# Altium PCB USB-C_Horizontal_Bridge.PcbDoc
Units mm, origin at the board's own origin, x right, y up, seen from the top; angles counter-clockwise.
Board outline 50 x 50 mm, 4 copper layers (Top Layer, Layer 2, Layer 3, Bottom Layer), stack 1.526 mm thick; 11 components, 16 nets, 70 pads, 26 vias.
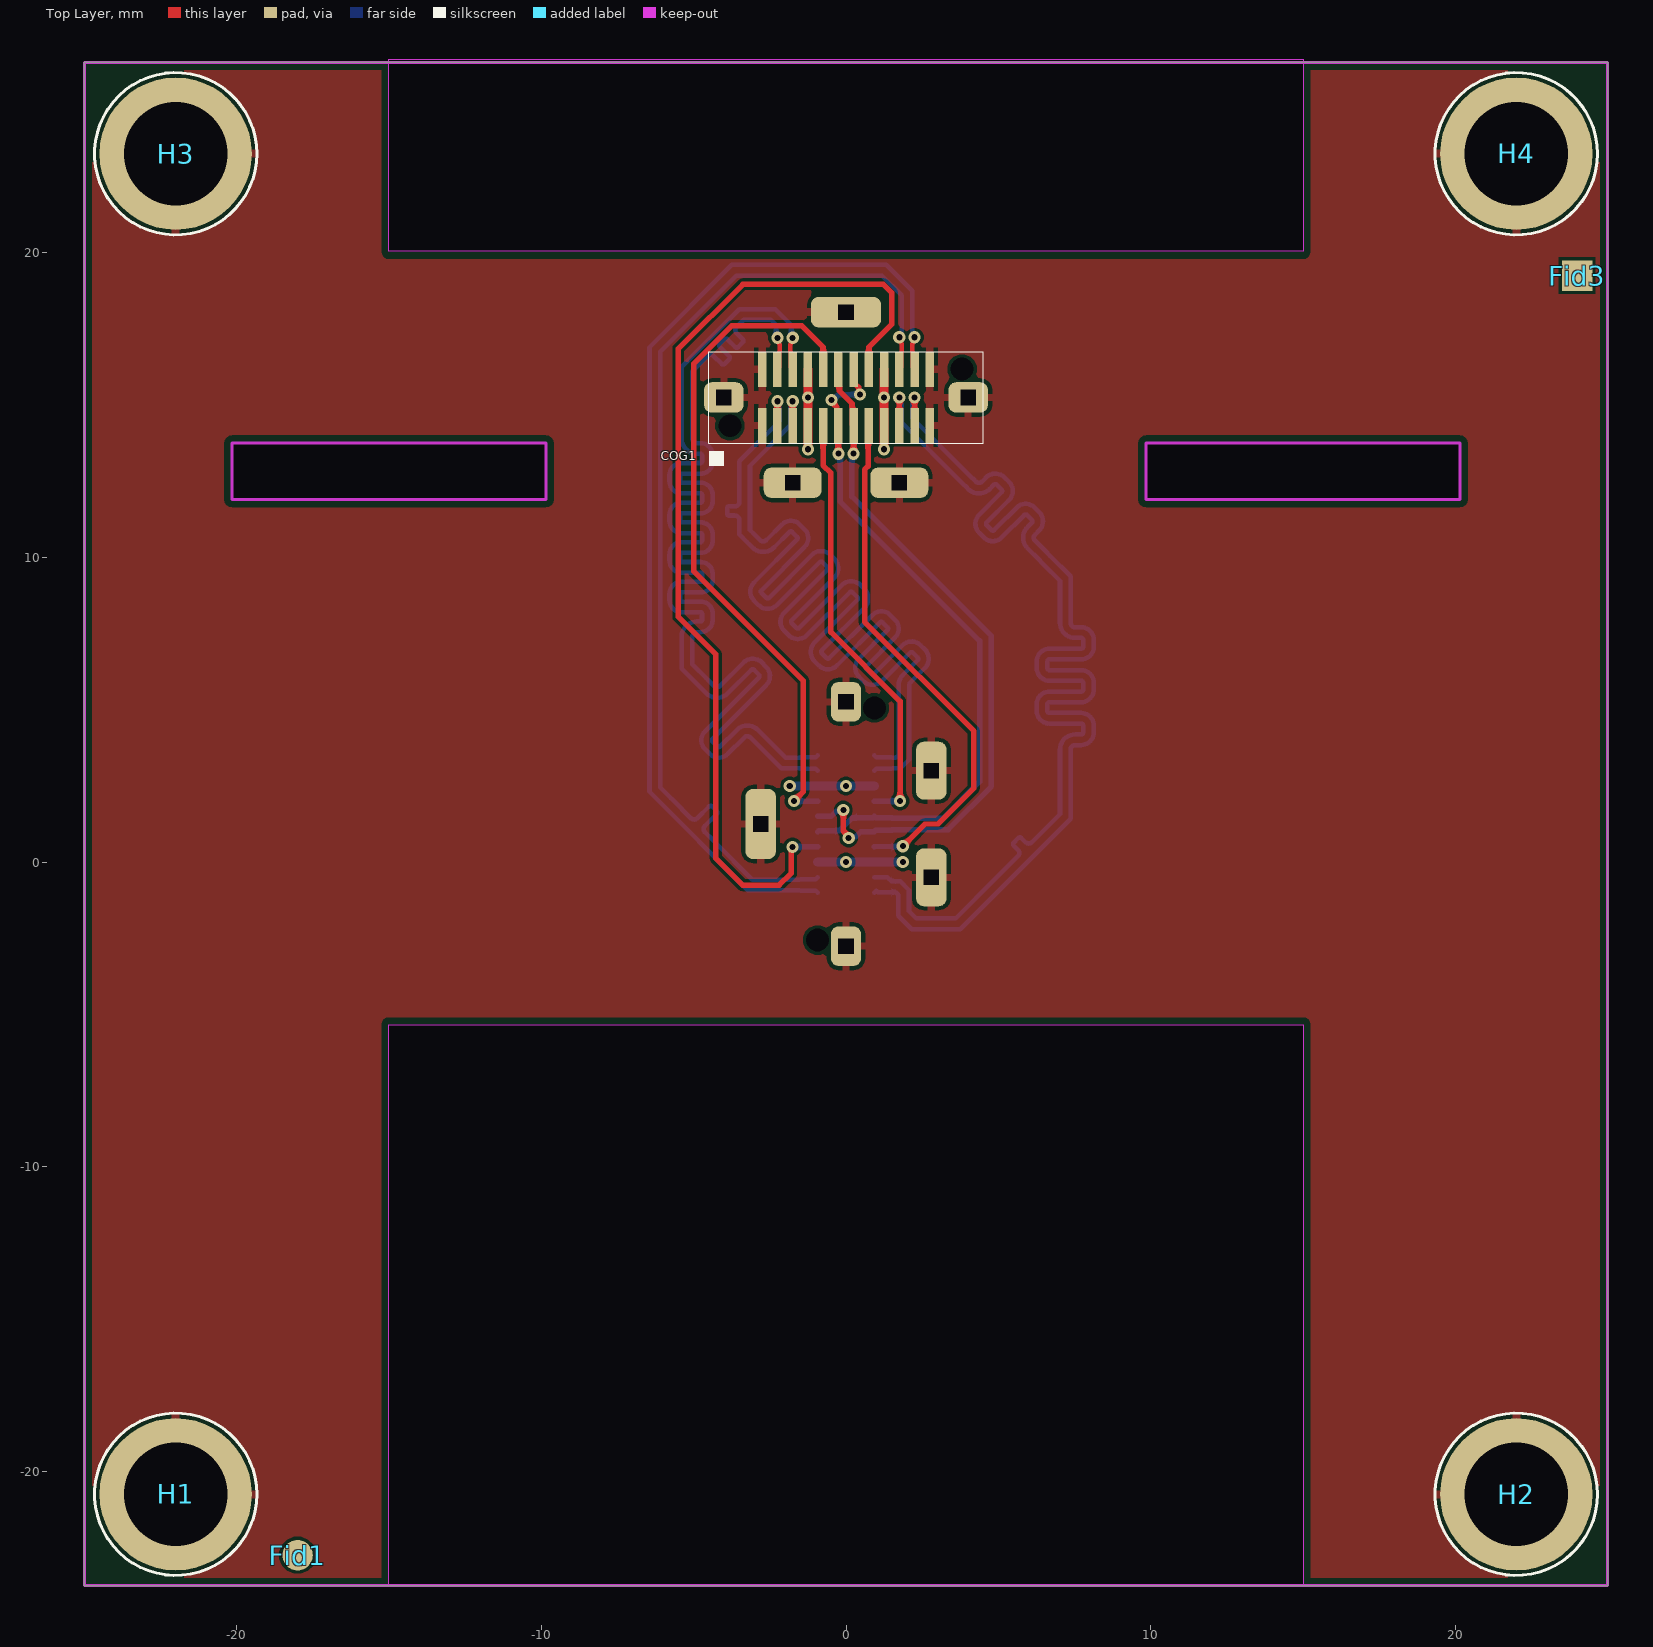
[diagram p0: Top Layer view]
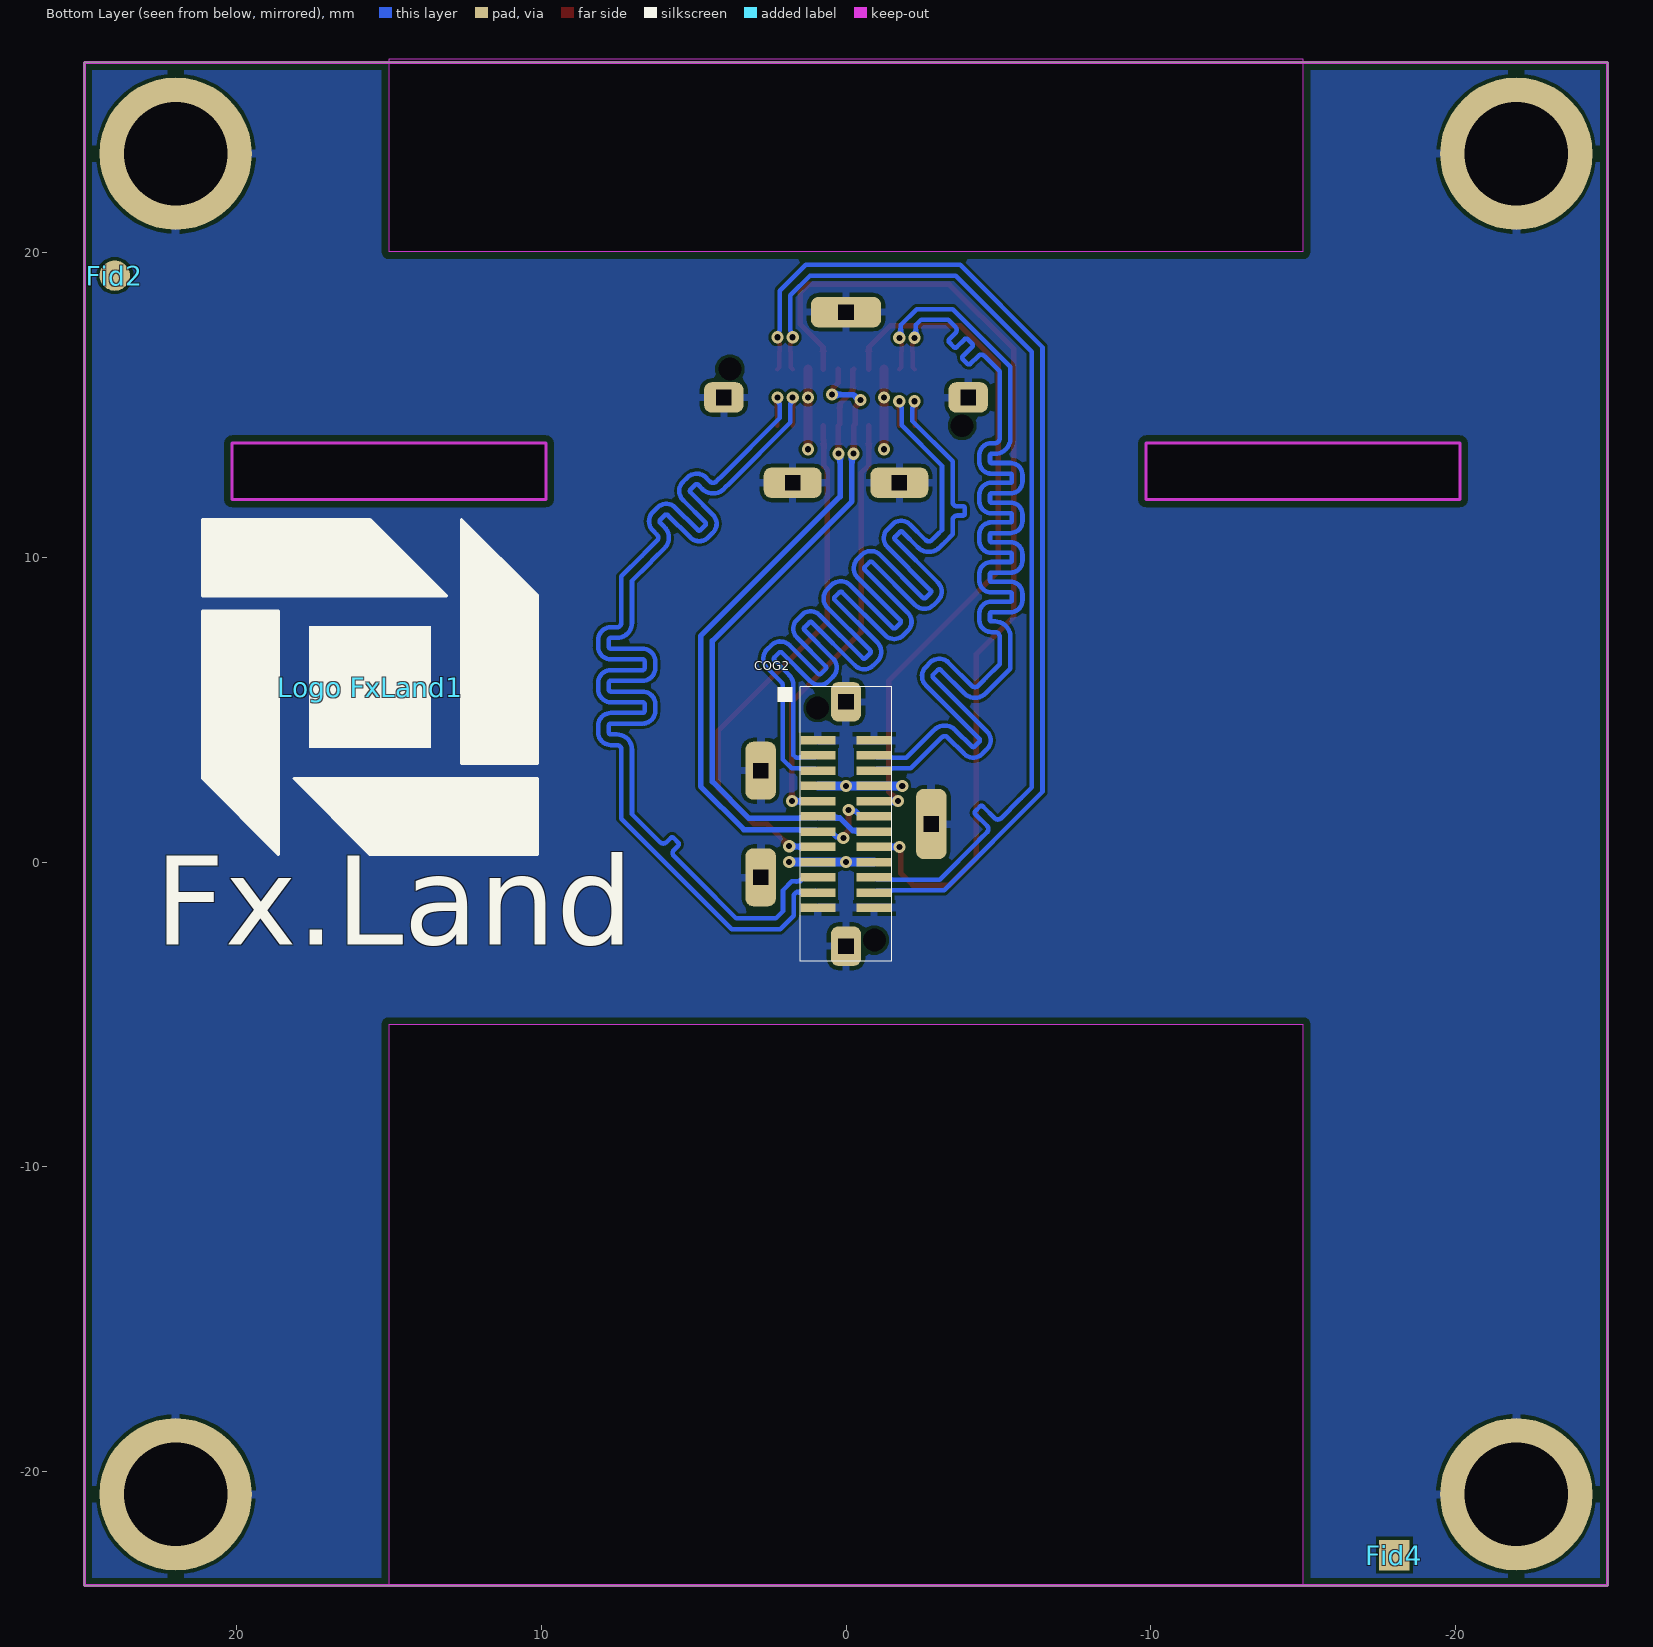
[diagram p1: Bottom Layer view, seen from below]
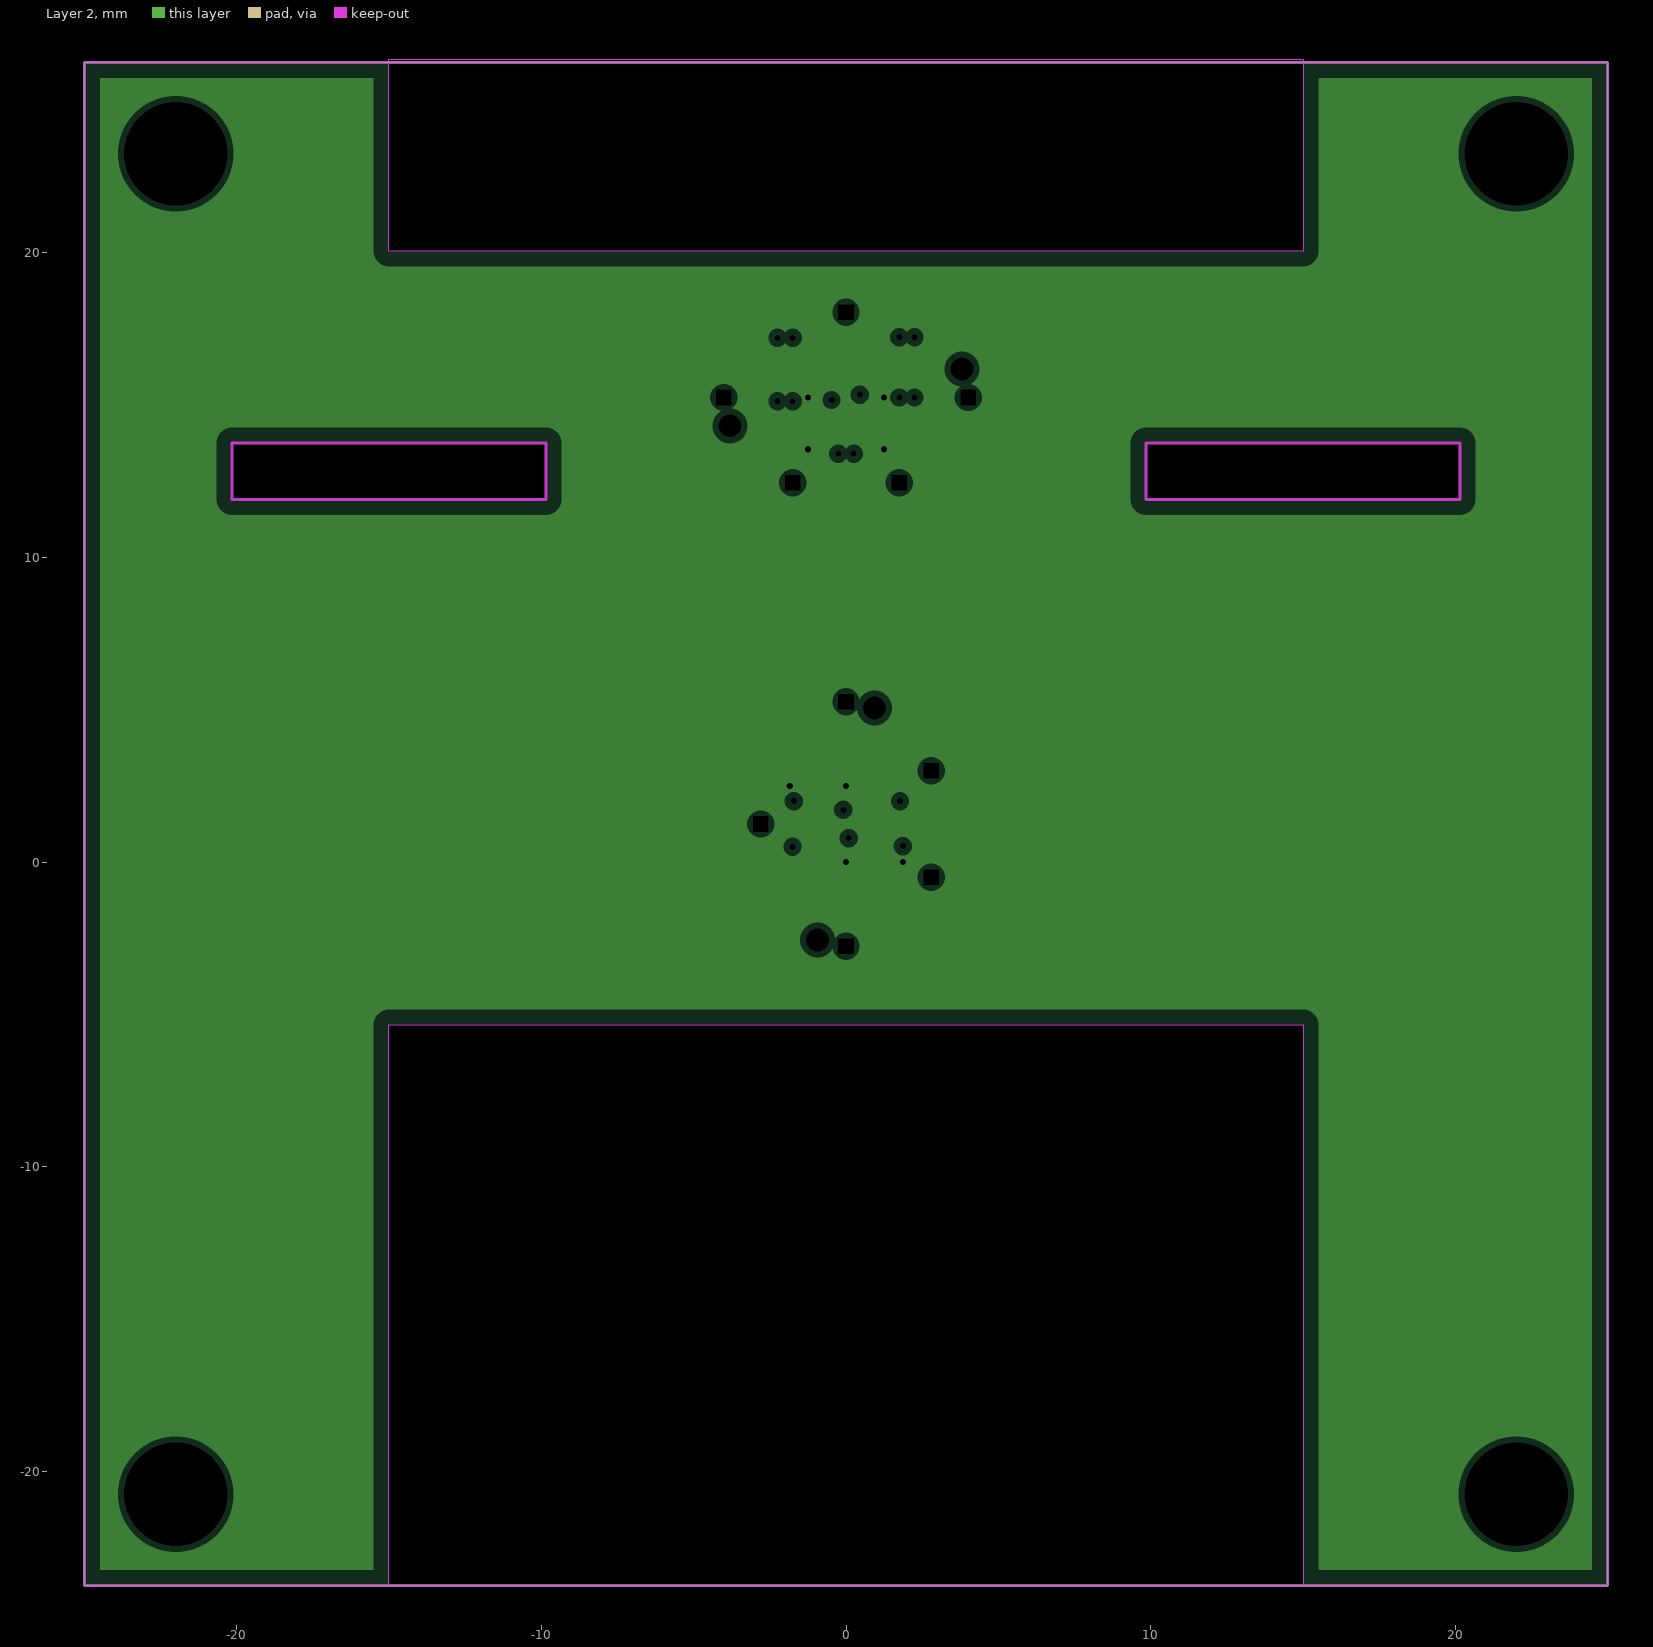
[diagram p2: Layer 2, clearances drawn from the general rule]
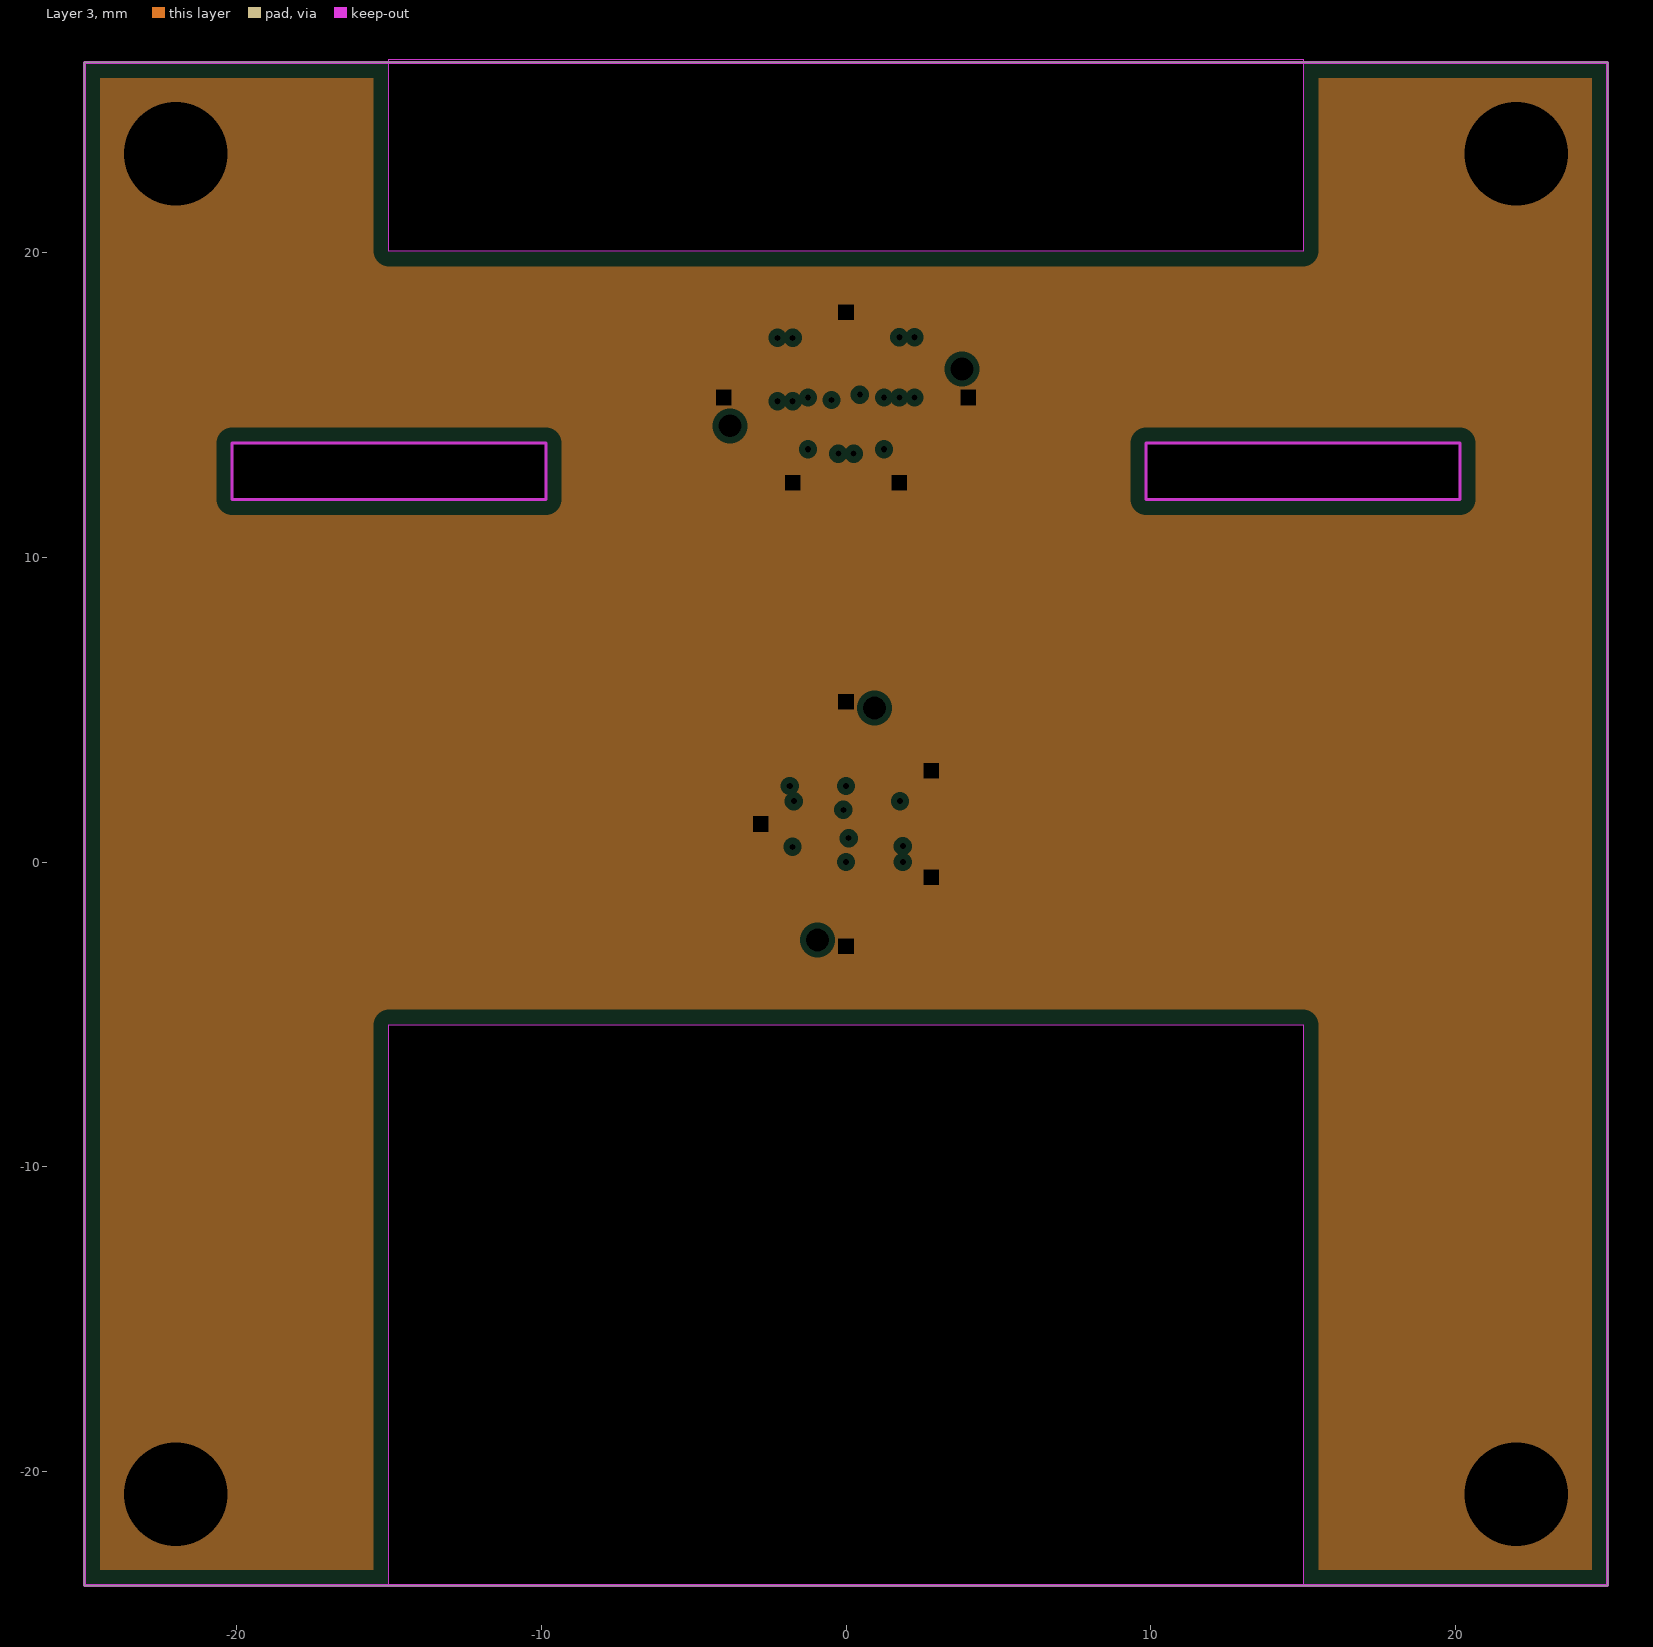
[diagram p3: Layer 3, clearances drawn from the general rule]

## Layer stack, top to bottom
Top Solder: solder mask 0.0102, Solder Resist, Dk 3.5
Top Layer: signal copper 0.035
Dielectric 1: prepreg 0.11, PP-015, Dk 4.29
Layer 2: plane copper 0.018, net CPWR
Dielectric 2: core 1.2, PP-006, Dk 4.29
Layer 3: plane copper 0.018, net GND
Dielectric 3: prepreg 0.11, PP-015, Dk 4.29
Bottom Layer: signal copper 0.035
Bottom Solder: solder mask 0.0102, Solder Resist, Dk 3.5

## Board outline
-25,-23.75 -25,26.25 25,26.25 25,-23.75
cut-out: -15,-23.75 -15,-5.344 15,-5.344 15,-23.75
cut-out: 15,26.35 15,20.05 -15,20.05 -15,26.35
cut-out: -20.15,13.75 -20.15,11.9 -9.85,11.9 -9.85,13.75
cut-out: 20.15,13.75 20.15,11.9 9.85,11.9 9.85,13.75

## Design rules (kind name [scope] priority, off if disabled: settings)
BoardOutlineClearance BoardOutlineClearanceText [OnLayer('Top Overlay')   or        OnLayer('Bottom Overlay')] p1: gap=0 ignorepadtopadclearanceinfootprint=FALSE
BoardOutlineClearance [All] p2: gap=0.254 ignorepadtopadclearanceinfootprint=FALSE except(0: Arc-SplitBarrior Arc-SplitContinuation Track-SplitBarrior Track-SplitContinuation SMDPad-SplitBarrior SMDPad-SplitContinuation THPad-SplitBarrior THPad-SplitContinuation Via-SplitBarrior Via-SplitContinuation Fill-SplitBarrior Fill-SplitContinuation Poly-SplitBarrior Poly-SplitContinuation Region-SplitBarrior Region-SplitContinuation Text-SplitBarrior Text-SplitContinuation; 0.127: Via-OutlineEdge Via-CavityEdge Via-CutoutEdge)
Clearance Clearance_DiffPair [(InDifferentialPairClass('All Differential Pairs'))] p1: gap=0.1 ignorepadtopadclearanceinfootprint=TRUE except(0: Arc-Text Track-Text SMDPad-Text THPad-Text Via-Text Fill-Text Poly-Text Region-Text Text-Text Text-Hole)
Clearance Clearance_HighPWR [InNet('VPWR')  or   InNet('Vin') or InNet('PWR')] p2: gap=0.15 ignorepadtopadclearanceinfootprint=FALSE except(0: Arc-Text Track-Text SMDPad-Text THPad-Text Via-Text Fill-Text Poly-Text Region-Text Text-Text Text-Hole)
Clearance Clearance_MidPWR [InNet('+12V') or InNet('+5V')] p3: gap=0.2 ignorepadtopadclearanceinfootprint=TRUE except(0: Arc-Text Track-Text SMDPad-Text THPad-Text Via-Text Fill-Text Poly-Text Region-Text Text-Text Text-Hole)
Clearance Clearance_LowPWR [InNet('NetC104_1')  or InNet('+3V3C')] p4: gap=0.125 ignorepadtopadclearanceinfootprint=TRUE except(0: Arc-Text Track-Text SMDPad-Text THPad-Text Via-Text Fill-Text Poly-Text Region-Text Text-Text Text-Hole)
Clearance Clearance_DiffNets [All] p5: gap=0.1 ignorepadtopadclearanceinfootprint=TRUE except(0: Arc-Text Track-Text SMDPad-Text THPad-Text Via-Text Fill-Text Poly-Text Region-Text Text-Text Text-Hole)
Clearance Clearance_SameNets [All] p6: gap=0 ignorepadtopadclearanceinfootprint=FALSE
ComponentClearance [All] p1: gap=0 collisioncheckmode=3 verticalgap=0 showdistances=FALSE
DiffPairsRouting DiffPairsRouting_USB3 [InDifferentialPairClass('USB3')] p1: maxlimit=0.2 minlimit=0.2 mostfreqgap=0.2 toplayer_minwidth=0.15 toplayer_maxwidth=0.15 toplayer_prefwidth=0.15 bottomlayer_minwidth=0.15 bottomlayer_maxwidth=0.15 bottomlayer_prefwidth=0.15 impedanceprofiledriven=TRUE impedanceprofileid={B374DB58-B03E-4DE0-8BAC-AD6921FB055F} impedanceprofilevalue=100.000000 filterlayerstackid={47B78BBF-7302-43D3-B572-ACE52A253E61} maxuncoupledlength=12.7
DiffPairsRouting DiffPairsRouting_USB [InDifferentialPairClass('USB2')] p2: maxlimit=0.2 minlimit=0.2 mostfreqgap=0.2 toplayer_minwidth=0.18 toplayer_maxwidth=0.18 toplayer_prefwidth=0.18 bottomlayer_minwidth=0.18 bottomlayer_maxwidth=0.18 bottomlayer_prefwidth=0.18 impedanceprofiledriven=TRUE impedanceprofileid={7EA89283-75E4-47CE-AB06-8AD4E228FE5F} impedanceprofilevalue=90.000000 filterlayerstackid={47B78BBF-7302-43D3-B572-ACE52A253E61} maxuncoupledlength=12.7
Height [All] p1: minheight=0 maxheight=100 prefheight=12.7
HoleSize [All] p1: absolutevalues=TRUE maxlimit=20 minlimit=0.2 maxpercent=80.000 minpercent=20.000
HoleToHoleClearance [All] p1: gap=0.25 allowstackedmicrovias=TRUE
MatchedLengths MatchLengths_xSignals_COG1_COG2 [InxSignalClass('xSignals_COG1_COG2_MatchLengthsClass')] p1: tolerance=0.1 checknetsindiffpair=FALSE checkdiffpairvsdiffpair=TRUE checkxsignals=TRUE checkothers=TRUE usedelayunits=TRUE delaytolerance=50.000000
MatchedLengths [InDifferentialPair('No Differential Pair')] p2: tolerance=0.1 checknetsindiffpair=TRUE checkdiffpairvsdiffpair=FALSE checkxsignals=FALSE checkothers=FALSE usedelayunits=TRUE delaytolerance=50.000000
MinimumAnnularRing [All] p1: minimumring=0.1
MinimumSolderMaskSliver [All] p1: minsoldermaskwidth=0
PlaneClearance [All] p1: clearance=0.2
PlaneConnect [All] p1: planeconnectstyle=Direct reliefexpansion=0.508 reliefentries=4 reliefconductorwidth=0.254 reliefairgap=0.254
PolygonConnect PolygonConnect_GND [InNet('GND')] p1: thpad.connectstyle=Relief thpad.reliefconductorwidth=0.25 thpad.reliefentries=4 thpad.polygonreliefangle="90 Angle" thpad.airgapwidth=0.125 smdpad.connectstyle=Relief smdpad.reliefconductorwidth=0.25 smdpad.reliefentries=4 smdpad.polygonreliefangle="90 Angle" smdpad.airgapwidth=0.125 via.connectstyle=Relief via.reliefconductorwidth=0.25 via.reliefentries=4 via.polygonreliefangle="90 Angle" via.airgapwidth=0.127
PolygonConnect PolygonConnect_HighPWR [InNet('VPWR') or InNet('CPWR')] p2: thpad.connectstyle=Relief thpad.reliefconductorwidth=1.25 thpad.reliefentries=4 thpad.polygonreliefangle="90 Angle" thpad.airgapwidth=0.254 smdpad.connectstyle=Relief smdpad.reliefconductorwidth=0.25 smdpad.reliefentries=4 smdpad.polygonreliefangle="90 Angle" smdpad.airgapwidth=0.05 via.connectstyle=Direct via.reliefconductorwidth=0.5 via.reliefentries=4 via.polygonreliefangle="90 Angle" via.airgapwidth=0.127
PolygonConnect PolygonConnect_MidPWR [InNet('+12V') or InNet('+5V')] p3: connectstyle=Relief reliefconductorwidth=0.7 reliefentries=4 polygonreliefangle="90 Angle" airgapwidth=0.254
PolygonConnect PolygonConnect_LowPWR [InNet('+1V2') or InNet('+2V7')] p4: connectstyle=Relief reliefconductorwidth=0.5 reliefentries=4 polygonreliefangle="90 Angle" airgapwidth=0.254
PolygonConnect [All] p5: thpad.connectstyle=Relief thpad.reliefconductorwidth=0.254 thpad.reliefentries=4 thpad.polygonreliefangle="90 Angle" thpad.airgapwidth=0.254 smdpad.connectstyle=Relief smdpad.reliefconductorwidth=0.254 smdpad.reliefentries=4 smdpad.polygonreliefangle="90 Angle" smdpad.airgapwidth=0.127 via.connectstyle=Relief via.reliefconductorwidth=0.254 via.reliefentries=4 via.polygonreliefangle="90 Angle" via.airgapwidth=0.1
RoutingVias [All] p1: holewidth=0.2 width=0.4 viastyle="Through Hole" minholewidth=0.2 minwidth=0.4 maxholewidth=0.2 maxwidth=0.4
SilkToSilkClearance [All] p1: silktosilkclearance=0
SilkToSolderMaskClearance [IsPad] p1: minsilkscreentomaskgap=0 clearancetoexposedcopper=TRUE
SolderMaskExpansion [All] p1: expansion=0.102 istentingtop=FALSE
UnRoutedNet [All] p1: checkbadconnections=TRUE
Width Width_power [InNet('CPWR')] p1: maxlimit=2 minlimit=0.2 preferedwidth=0.7
Width Width_gnd [InNet('GND')] p2: maxlimit=2 minlimit=0.2 preferedwidth=0.7
Width [All] p3: maxlimit=0.18 minlimit=0.18 preferedwidth=0.18 impedanceprofiledriven=TRUE impedanceprofileid={25912D3B-FB2E-4153-A5FE-3939228A06DA} impedanceprofilevalue=50.000000 minimp=50.000000 maximp=50.000000 favimp=50.000000
19 further rules are at their usual default settings.

## Classes and differential pairs
differential pair class USB2: USBG
differential pair class USB3: USBG_RX1 USBG_RX2 USBG_TX1 USBG_TX2
differential pair USBG: +USBG_P -USBG_N
differential pair USBG_TX2: +USBG_TX2_P -USBG_TX2_N
differential pair USBG_TX1: +USBG_TX1_P -USBG_TX1_N
differential pair USBG_RX2: +USBG_RX2_P -USBG_RX2_N
differential pair USBG_RX1: +USBG_RX1_P -USBG_RX1_N

## Components (designator, comment, footprint, x,y, rotation, side; value= is the part's Value field where it differs from the comment)
COG1 "USB4151" USB4151-GF-C 0,15.25 r180 top locked
COG2 "USB4151" USB4151-GF-C 0,1.25 r90 bottom locked
Fid1 "Fiducial" FidR_1.0mm -18,-22.75 r0 top locked
Fid2 "Fiducial" FidR_1.0mm 24,19.25 r180 bottom locked
Fid3 "Fiducial" FidS_1.0mm 24,19.25 r0 top locked
Fid4 "Fiducial" FidS_1.0mm -18,-22.75 r180 bottom locked
H1 "Hole M3" HOLE_M3 -22,-20.75 r0 top locked
H2 "Hole M3" HOLE_M3 22,-20.75 r0 top locked
H3 "Hole M3" HOLE_M3 -22,23.25 r0 top locked
H4 "Hole M3" HOLE_M3 22,23.25 r0 top locked
"Logo FxLand1" "FxLand" Logo_FxLand_3 15.619,5.742 r180 bottom

## Footprints (in the part's own frame and the unit in brackets; to place one, negate y for a bottom-side part, rotate by r counter-clockwise, add the part's x,y. Pads: shape width x height; smd on the part's side, far side on the other; paste and mask are expansions set on the pad)
FidR_1.0mm [mm]
  round 1 smd: 1(0,0)
FidS_1.0mm [mm]
  rect 1x1 smd: 1(0,0)
HOLE_M3 [mm]
  round 5 hole 3.4: 1(0,0)
  silkscreen extent -2.66,-2.66 2.67,2.66
Logo_FxLand_3 [mm]
  silkscreen extent -5.5,-5.5 5.5,5.5
USB4151-GF-C [mm]
  round 0 hole 0.75 unplated mask+0: 0(-3.81,-0.93) 0(3.81,0.93)
  rect 0.28x1.15 smd: 1(2.75,0.925) 2(2.25,0.925) 3(1.75,0.925) 4(1.25,0.925) 5(0.75,0.925) 6(0.25,0.925) 7(-0.25,0.925) 8(-0.75,0.925) 9(-1.25,0.925) 10(-1.75,0.925) 11(-2.25,0.925) 12(-2.75,0.925) 21(-2.75,-0.925) 22(-2.25,-0.925) 23(-1.75,-0.925) 24(-1.25,-0.925) 25(-0.75,-0.925) 26(-0.25,-0.925) 27(0.25,-0.925) 28(0.75,-0.925) 29(1.25,-0.925) 30(1.75,-0.925) 31(2.25,-0.925) 32(2.75,-0.925)
  rrect50% 1.3x1 hole 0.5 square: SH(-4.01,0) SH(4.01,0)
  rrect50% 1.9x1 hole 0.5 square: SH(-1.75,2.8) SH(1.75,2.8)
  rrect50% 2.3x1 hole 0.5 square: SH(0,-2.8)
  silkscreen extent -4.5,-1.5 4.5,2.25, body extent -4.33,-2.88 4.33,2.88, height 11.15

## Part data
COG1 COG2: library part CO0017, "USB C connector Plug", ID=26, ManfactPart=USB4151-GF-C, Part Number=CO0017, RefVal=USB4151
Fid1 Fid2: library part ME0011, "Fiducial Round 1mm", ID=11, Part Number=ME0011, RefVal=Fiducial
Fid3 Fid4: library part ME0012, "Fiducial Sqaure 1mm", ID=12, Part Number=ME0012, RefVal=Fiducial
H1 H2 H3 H4: library part ME0001, "Mounting Hole M3", ID=1, Part Number=ME0001, RefVal="Hole M3"
"Logo FxLand1": library part ME0008, "Logo FxLand 3", ID=8, Part Number=ME0008, RefVal=FxLand

## Via types
v1: diameter 0.4, hole 0.2, Top Layer to Bottom Layer, tented both sides, 26 vias

## Nets (pads, with @x,y where several pads share a name; then routed paths per layer and width w, separated by ;. In a path a pad name is that pad's centre, name@x,y a point inside that pad or via, vN(x,y) a via of type N, cw(c..) or ccw(c..) an arc to the next point about the centre after c; other vN are vias at no path point)
CC1: COG1.5 COG2.5 | length 14.2
  Top Layer w0.18: COG1.5 -0.75,13.022 -0.5,12.772 -0.5,7.55 1.775,5.275 v1(1.775,2)
  Bottom Layer w0.18: COG2.5 v1(1.775,2)
CC2: COG1.25 COG2.25 | length 32.8
  Top Layer w0.18: v1(-1.759,0.5) -1.802,0.458 -1.802,0.302 -1.804,0.3 -1.804,-0.37 -2.192,-0.758 -3.391,-0.758 -4.28,0.13 -4.28,6.83 -5.5,8.05 -5.5,16.85 -3.386,18.964 1.231,18.964 1.5,18.695 1.5,17.65 0.75,16.9 COG1.25
  Bottom Layer w0.18: v1(-1.759,0.5) COG2.25
CPWR: COG1.4 COG1.9 COG1.24 COG1.29 COG2.4 COG2.9 COG2.24 COG2.29 | length 10.8
  Top Layer w0.3: v1(-1.25,13.55) COG1.4 v1(-1.25,15.25) COG1.29 ; v1(1.25,13.55) COG1.9 v1(1.25,15.25) COG1.24
  Bottom Layer w0.3: v1(-1.847,2.5) COG2.29 v1(0,2.5) COG2.4 ; COG2.24 v1(0,0) COG2.9 v1(1.865,0)
GND: COG1.1 COG1.12 COG1.21 COG1.32 COG1.SH COG2.1 COG2.12 COG2.21 COG2.32 COG2.SH H1.1 H2.1 H3.1 H4.1
SBU1: COG1.8 COG2.8 | length 17.5
  Top Layer w0.18: COG1.8 0.75,13.865 0.725,13.84 0.725,12.997 0.61,12.882 0.61,7.883 4.197,4.296 4.197,2.425 3.022,1.25 2.593,1.25 v1(1.865,0.523)
  Bottom Layer w0.18: COG2.8 0.936,0.511 1.854,0.511 v1(1.865,0.523)
SBU2: COG1.28 COG2.28 | length 22.5
  Top Layer w0.18: v1(-1.712,2) -1.397,2.315 -1.397,5.947 -5,9.55 -5,16.35 -3.752,17.598 -1.448,17.598 -0.75,16.9 COG1.28
  Bottom Layer w0.18: v1(-1.712,2) COG2.28
USBG_N: COG1.7 COG1.27 COG2.7 COG2.27 | length 23.1
  Top Layer w0.18: COG1.27 -0.221,16.146 -0.221,15.467 0.2,15.046 0.2,14.375 COG1.7 v1(0.25,13.405) ; v1(-0.088,1.713) -0.088,1.023 0.088,0.846 v1(0.088,0.787)
  Bottom Layer w0.18: COG2.27 -0.49,1.5 -0.319,1.671 -0.131,1.671 v1(-0.088,1.713) ; v1(0.088,0.787) 0.131,0.829 0.319,0.829 0.49,1 COG2.7 0.975,1.05 1.502,1.05 1.515,1.063 3.35,1.063 4.769,2.481 4.769,7.419 0.19,11.997 0.19,13.34 v1@0.2,13.35
USBG_P: COG1.6 COG1.26 COG2.6 COG2.26 | length 22.5
  Top Layer w0.18: v1(-0.473,15.167) -0.473,15.108 -0.3,14.935 -0.3,14.375 COG1.6 v1(-0.25,13.405) ; v1@-0.2,13.35 v1@-0.2,13.395 ; COG1.26 0.25,15.74 0.412,15.578 0.412,15.386 v1(0.455,15.343)
  Bottom Layer w0.18: COG2.26 -0.894,1.031 -0.219,1.031 0.2,1.45 0.875,1.45 COG2.6 0.975,1.45 1.509,1.45 1.515,1.443 3.193,1.443 4.389,2.639 4.389,7.261 -0.19,11.84 -0.19,13.34 v1@-0.2,13.35 ; v1(-0.473,15.167) -0.413,15.167 -0.237,15.343 v1(0.455,15.343)
USBG_RX1_N: COG1.30 COG2.30 | length 35
  Top Layer w0.15: COG1.30 -1.815,16.24 -1.815,16.753 -1.825,16.763 -1.825,16.995 -1.798,17.023 -1.798,17.16 v1(-1.75,17.208)
  Bottom Layer w0.15: -3.014,6.304 -2.865,6.155 ; -3.014,6.304 ccw(c-3.064,6.254) -3.114,6.304 -3.879,5.54 cw(c-4.233,5.893) -4.587,5.54 -4.638,5.591 -4.763,5.716 -5.075,6.028 -5.392,6.345 -5.392,7.4 cw(c-4.892,7.4) -4.892,7.9 -4.772,7.9 ccw(c-4.772,7.945) -4.727,7.945 -4.727,8.155 ccw(c-4.772,8.155) -4.772,8.2 -5.399,8.2 cw(c-5.399,8.595) -5.794,8.595 -5.794,8.805 cw(c-5.399,8.805) -5.399,9.2 -4.772,9.2 ccw(c-4.772,9.245) -4.727,9.245 -4.727,9.455 ccw(c-4.772,9.455) -4.772,9.5 -5.399,9.5 cw(c-5.399,9.895) -5.794,9.895 -5.794,10.105 cw(c-5.399,10.105) -5.399,10.5 -4.772,10.5 ccw(c-4.772,10.545) -4.727,10.545 -4.727,10.755 ccw(c-4.772,10.755) -4.772,10.8 -5.399,10.8 cw(c-5.399,11.195) -5.794,11.195 -5.794,11.405 cw(c-5.399,11.405) -5.399,11.8 -4.772,11.8 ccw(c-4.772,11.845) -4.727,11.845 -4.727,12.055 ccw(c-4.772,12.055) -4.772,12.1 -5.399,12.1 cw(c-5.399,12.495) -5.794,12.495 -5.794,12.705 cw(c-5.399,12.705) -5.399,13.1 -4.772,13.1 ccw(c-4.772,13.145) -4.727,13.145 -4.727,13.355 ccw(c-4.772,13.355) -4.772,13.4 -4.892,13.4 cw(c-4.892,13.9) -5.392,13.9 -5.392,14.15 -5.392,16.258 -3.5,18.15 -2.318,18.15 -1.798,17.63 -1.798,17.256 v1(-1.75,17.208) ; -2.865,6.155 cw(c-2.915,6.105) -2.864,6.055 -4.624,4.295 ccw(c-4.327,3.998) -4.624,3.7 -4.474,3.551 ccw(c-4.177,3.848) -3.879,3.55 -3.344,4.085 cw(c-3.238,3.979) -3.132,4.085 -2.401,3.355 -2.276,3.229 -2.122,3.075 -1.513,3.075 -1.503,3.065 -0.99,3.065 COG2.30
USBG_RX1_P: COG1.31 COG2.31 | length 35.1
  Top Layer w0.15: COG1.31 -2.185,16.24 -2.185,16.753 -2.175,16.763 -2.175,16.995 -2.202,17.023 -2.202,17.16 v1(-2.25,17.208)
  Bottom Layer w0.15: v1(-2.25,17.208) -2.296,17.254 -2.296,17.633 -2.463,17.8 -2.556,17.8 -3.355,17.8 -3.587,17.568 ccw(c-3.481,17.462) -3.587,17.356 -3.388,17.157 cw(c-3.438,17.107) -3.388,17.058 -3.538,16.908 cw(c-3.588,16.958) -3.638,16.908 -3.893,17.163 ccw(c-3.943,17.113) -3.993,17.163 -4.142,17.013 ccw(c-4.092,16.963) -4.142,16.913 -3.834,16.604 cw(c-3.884,16.554) -3.834,16.504 -3.984,16.354 cw(c-4.034,16.404) -4.083,16.354 -4.336,16.607 ccw(c-4.442,16.501) -4.548,16.607 -4.851,16.304 -5.042,16.113 -5.042,14.15 -5.042,13.9 ccw(c-4.892,13.9) -4.892,13.75 -4.772,13.75 cw(c-4.772,13.355) -4.377,13.355 -4.377,13.145 cw(c-4.772,13.145) -4.772,12.75 -5.399,12.75 ccw(c-5.399,12.705) -5.444,12.705 -5.444,12.495 ccw(c-5.399,12.495) -5.399,12.45 -4.772,12.45 cw(c-4.772,12.055) -4.377,12.055 -4.377,11.845 cw(c-4.772,11.845) -4.772,11.45 -5.399,11.45 ccw(c-5.399,11.405) -5.444,11.405 -5.444,11.195 ccw(c-5.399,11.195) -5.399,11.15 -4.772,11.15 cw(c-4.772,10.755) -4.377,10.755 -4.377,10.545 cw(c-4.772,10.545) -4.772,10.15 -5.399,10.15 ccw(c-5.399,10.105) -5.444,10.105 -5.444,9.895 ccw(c-5.399,9.895) -5.399,9.85 -4.772,9.85 cw(c-4.772,9.455) -4.377,9.455 -4.377,9.245 cw(c-4.772,9.245) -4.772,8.85 -5.399,8.85 ccw(c-5.399,8.805) -5.444,8.805 -5.444,8.595 ccw(c-5.399,8.595) -5.399,8.55 -4.772,8.55 cw(c-4.772,8.155) -4.377,8.155 -4.377,7.945 cw(c-4.772,7.945) -4.772,7.55 -4.892,7.55 ccw(c-4.892,7.4) -5.042,7.4 -5.042,6.49 -4.58,6.028 -4.516,5.964 -4.39,5.838 -4.338,5.787 ccw(c-4.233,5.893) -4.127,5.787 -3.362,6.552 cw(c-3.064,6.254) -2.829,6.603 -2.818,6.603 -2.566,6.351 -2.566,6.34 cw(c-2.915,6.105) -2.617,5.807 -4.377,4.048 ccw(c-4.327,3.998) -4.377,3.948 -4.227,3.798 ccw(c-4.177,3.848) -4.127,3.798 -3.592,4.333 cw(c-3.238,3.979) -2.885,4.333 -2.154,3.602 -2.028,3.477 -1.977,3.425 -1.513,3.425 -1.503,3.435 -0.99,3.435 COG2.31
USBG_RX2_N: COG1.10 COG2.10 | length 35.8
  Top Layer w0.15: COG1.10 v1(1.75,15.25)
  Bottom Layer w0.15: COG2.10 1.36,-0.5 1.494,-0.634 1.775,-0.634 2.068,-0.927 2.068,-1.618 2.3,-1.85 3.6,-1.85 4.95,-0.5 5.59,0.14 5.643,0.193 ccw(c5.537,0.299) 5.643,0.405 5.508,0.54 cw(c5.558,0.59) 5.508,0.64 5.658,0.79 cw(c5.708,0.74) 5.758,0.79 5.893,0.655 ccw(c5.999,0.761) 6.105,0.655 6.45,1 7.023,1.573 7.023,2.517 7.023,3.691 cw(c7.523,3.691) 7.523,4.191 7.715,4.191 ccw(c7.715,4.262) 7.785,4.262 7.785,4.474 ccw(c7.715,4.474) 7.715,4.545 6.682,4.545 cw(c6.682,4.965) 6.261,4.965 6.261,5.177 cw(c6.682,5.177) 6.682,5.598 7.715,5.598 ccw(c7.715,5.668) 7.785,5.668 7.785,5.88 ccw(c7.715,5.88) 7.715,5.951 6.682,5.951 cw(c6.682,6.372) 6.261,6.372 6.261,6.584 cw(c6.682,6.584) 6.682,7.004 7.715,7.004 ccw(c7.715,7.075) 7.785,7.075 7.785,7.287 ccw(c7.715,7.287) 7.715,7.357 7.523,7.357 cw(c7.523,7.857) 7.023,7.857 7.023,8.107 7.023,9.232 6.446,9.809 6.321,9.934 5.961,10.294 cw(c6.314,10.648) 5.961,11.002 6.096,11.137 ccw(c6.046,11.187) 6.096,11.237 5.946,11.387 ccw(c5.896,11.337) 5.846,11.387 ; v1(1.75,15.25) 1.798,15.202 1.798,15.064 1.825,15.037 1.825,14.43 3.833,12.422 3.958,12.297 4.009,12.246 ccw(c4.363,12.599) 4.716,12.246 4.851,12.38 ; 4.852,12.381 cw(c4.902,12.331) 4.952,12.381 5.101,12.231 cw(c5.052,12.181) 5.101,12.131 4.32,11.35 4.32,11.339 ccw(c4.669,11.104) 4.372,10.806 4.52,10.657 ccw(c4.818,10.954) 5.116,10.656 5.846,11.386
USBG_RX2_P: COG1.11 COG2.11 | length 35.8
  Top Layer w0.15: COG1.11 v1(2.25,15.25)
  Bottom Layer w0.15: COG2.11 0.99,-0.935 1.039,-0.984 1.63,-0.984 1.718,-1.072 1.718,-1.763 2.155,-2.2 3.745,-2.2 7.373,1.428 7.373,2.517 7.373,3.691 cw(c7.523,3.691) 7.523,3.841 7.715,3.841 ccw(c7.715,4.262) 8.135,4.262 8.135,4.474 ccw(c7.715,4.474) 7.715,4.895 6.682,4.895 cw(c6.682,4.965) 6.611,4.965 6.611,5.177 cw(c6.682,5.177) 6.682,5.248 7.715,5.248 ccw(c7.715,5.668) 8.135,5.668 8.135,5.88 ccw(c7.715,5.88) 7.715,6.301 6.682,6.301 cw(c6.682,6.372) 6.611,6.372 6.611,6.584 cw(c6.682,6.584) 6.682,6.654 7.715,6.654 ccw(c7.715,7.075) 8.135,7.075 8.135,7.287 ccw(c7.715,7.287) 7.715,7.707 7.523,7.707 cw(c7.523,7.857) 7.373,7.857 7.373,8.107 7.373,9.377 6.694,10.056 6.568,10.182 6.208,10.542 cw(c6.314,10.648) 6.208,10.754 6.343,10.889 ccw(c6.046,11.187) 6.343,11.484 6.194,11.634 ccw(c5.896,11.337) 5.661,11.685 5.65,11.685 4.868,10.904 cw(c4.818,10.954) 4.769,10.904 4.619,11.054 cw(c4.669,11.104) 4.619,11.154 ; v1(2.25,15.25) 2.202,15.202 2.202,15.064 2.175,15.037 2.175,14.575 4.08,12.67 4.206,12.544 4.257,12.493 ccw(c4.363,12.599) 4.469,12.493 4.655,12.68 4.666,12.68 cw(c4.902,12.331) 5.199,12.629 5.349,12.479 cw(c5.052,12.181) 5.349,11.884 4.619,11.154
USBG_TX1_N: COG1.3 COG2.3 | length 35.5
  Top Layer w0.15: COG1.3 v1(-1.75,15.125)
  Bottom Layer w0.15: v1(-1.75,15.125) -1.798,15.077 -1.798,14.939 -1.825,14.912 -1.825,14.333 -3.15,13.008 -3.15,10.9 -3,10.75 -2.874,10.624 -2.823,10.573 ccw(c-2.717,10.679) -2.611,10.573 -2.107,11.077 cw(c-1.81,10.78) -1.575,11.129 -1.564,11.129 -1.513,11.078 -1.364,10.929 -1.313,10.878 -1.313,10.867 cw(c-1.661,10.632) -1.364,10.335 ; -1.365,10.334 -2.771,8.928 ccw(c-2.722,8.879) -2.771,8.829 -2.623,8.681 ccw(c-2.573,8.73) -2.524,8.68 -1.117,10.087 cw(c-0.82,9.79) -0.585,10.139 -0.574,10.139 -0.523,10.088 -0.375,9.939 -0.323,9.888 -0.323,9.877 cw(c-0.671,9.642) -0.375,9.345 -1.781,7.938 ccw(c-1.732,7.889) -1.781,7.839 -1.633,7.691 ccw(c-1.583,7.74) -1.534,7.69 -0.127,9.098 cw(c0.17,8.801) 0.405,9.149 0.416,9.149 0.467,9.098 0.615,8.949 0.667,8.898 0.667,8.887 cw(c0.318,8.652) 0.615,8.355 ; 0.615,8.354 -0.791,6.949 ccw(c-0.742,6.899) -0.791,6.85 -0.643,6.701 ccw(c-0.593,6.751) -0.544,6.701 0.863,8.108 cw(c1.16,7.811) 1.395,8.159 1.406,8.159 1.457,8.108 1.605,7.959 1.657,7.908 1.657,7.897 cw(c1.308,7.662) 1.605,7.365 0.673,6.432 ccw(c0.722,6.383) 0.673,6.333 0.821,6.185 ccw(c0.871,6.234) 0.92,6.184 1.853,7.118 cw(c2.15,6.821) 2.385,7.169 2.396,7.169 2.447,7.118 2.595,6.969 2.647,6.918 2.647,6.907 cw(c2.298,6.672) 2.595,6.375 ; COG2.3 0.99,3.065 1.503,3.065 1.513,3.075 1.782,3.075 2.075,3.368 2.075,4.594 2.075,5.793 cw(c2.225,5.793) 2.119,5.899 2.595,6.375
USBG_TX1_P: COG1.2 COG2.2 | length 35.5
  Top Layer w0.15: COG1.2 v1(-2.25,15.125)
  Bottom Layer w0.15: -2.276,8.433 cw(c-2.573,8.73) -2.87,8.433 -3.018,8.582 cw(c-2.722,8.879) -3.018,9.176 -1.611,10.583 ccw(c-1.661,10.632) -1.612,10.682 ; -2.275,8.434 -0.869,9.84 cw(c-0.82,9.79) -0.77,9.84 ; v1(-2.25,15.125) -2.202,15.077 -2.202,14.939 -2.175,14.912 -2.175,14.478 -3.5,13.153 -3.5,12.85 -3.5,11.825 cw(c-3.65,11.825) -3.65,11.675 -3.848,11.675 ccw(c-3.848,11.63) -3.893,11.63 -3.893,11.42 ccw(c-3.848,11.42) -3.848,11.375 -3.65,11.375 cw(c-3.65,11.225) -3.5,11.225 -3.5,11.15 -3.5,10.755 -3.247,10.503 -3.122,10.377 -3.071,10.326 ccw(c-2.717,10.679) -2.364,10.326 -1.859,10.83 cw(c-1.81,10.78) -1.76,10.829 ; -1.76,10.829 -1.613,10.682 ; -1.286,7.443 cw(c-1.583,7.74) -1.88,7.443 -2.029,7.592 cw(c-1.732,7.889) -2.029,8.186 -0.622,9.593 ccw(c-0.671,9.642) -0.622,9.692 ; -1.286,7.444 0.12,8.85 cw(c0.17,8.801) 0.22,8.85 ; -0.77,9.839 -0.623,9.692 ; -0.296,6.454 cw(c-0.593,6.751) -0.89,6.454 -1.039,6.602 cw(c-0.742,6.899) -1.039,7.196 0.368,8.603 ccw(c0.318,8.652) 0.368,8.702 ; -0.296,6.454 1.11,7.86 cw(c1.16,7.811) 1.21,7.86 ; 0.22,8.849 0.367,8.702 ; COG2.2 0.99,3.435 1.503,3.435 1.513,3.425 1.637,3.425 1.725,3.513 1.725,4.244 1.725,5.793 cw(c2.225,5.793) 1.871,6.146 2.348,6.623 ccw(c2.298,6.672) 2.347,6.722 2.2,6.869 ; 1.168,5.937 cw(c0.871,6.234) 0.574,5.937 0.425,6.086 cw(c0.722,6.383) 0.425,6.68 1.358,7.613 ccw(c1.308,7.662) 1.357,7.712 ; 1.168,5.938 2.1,6.87 cw(c2.15,6.821) 2.2,6.87 ; 1.21,7.859 1.357,7.712
USBG_TX2_N: COG1.23 COG2.23 | length 33.8
  Top Layer w0.15: COG1.23 1.815,16.24 1.815,16.753 1.825,16.763 1.825,17.012 1.798,17.039 1.798,17.177 v1(1.75,17.225)
  Bottom Layer w0.15: COG2.23 -0.99,-0.565 -1.503,-0.565 -1.513,-0.575 -3.075,-0.575 -4.327,0.677 -4.38,0.73 -4.629,0.979 cw(c-4.523,1.085) -4.629,1.191 -4.247,1.574 ccw(c-4.297,1.624) -4.247,1.674 -4.396,1.824 ccw(c-4.446,1.774) -4.496,1.824 -4.879,1.441 cw(c-4.985,1.547) -5.091,1.441 -5.692,2.042 -5.745,2.095 -6,2.35 -6.1,2.45 -6.1,2.75 -6.1,4.85 -6.1,16.755 -3.605,19.25 1.181,19.25 1.825,18.606 1.825,17.438 1.798,17.411 1.798,17.273 v1(1.75,17.225)
USBG_TX2_P: COG1.22 COG2.22 | length 34.3
  Top Layer w0.15: COG1.22 2.185,16.24 2.185,16.753 2.175,16.763 2.175,17.012 2.202,17.039 2.202,17.177 v1(2.25,17.225)
  Bottom Layer w0.15: COG2.22 -0.99,-0.935 -1.503,-0.935 -1.513,-0.925 -3.22,-0.925 -6.45,2.305 -6.45,16.9 -3.75,19.6 1.325,19.6 2.175,18.75 2.175,17.438 2.202,17.411 2.202,17.273 v1(2.25,17.225)
pads on no net: COG1.0 COG2.0 Fid1.1 Fid2.1 Fid3.1 Fid4.1

## Polygon pours and split planes (outlines as drawn)
no net on Layer0 "Default Coverlay 2 Top" (split plane): 6,25.25 35,25.25 35,-22.75 6,-22.75
no net on Layer0 "Default Coverlay 2 Top" (split plane): 195,22.25 200,22.25 200,-19.75 195,-19.75
no net on Layer0 "Default Coverlay 2 Top" (split plane): 135,22.25 140,22.25 140,-19.75 135,-19.75
no net on Layer0 "Default Coverlay 2 Bottom" (split plane): 6,25.25 35,25.25 35,-22.75 6,-22.75
no net on Layer0 "Default Coverlay 2 Bottom" (split plane): 195,22.25 200,22.25 200,-19.75 195,-19.75
no net on Layer0 "Default Coverlay 2 Bottom" (split plane): 135,22.25 140,22.25 140,-19.75 135,-19.75
GND on Bottom Layer "GND_L04_P020" (solid, pour order 20): -25,-23.75 25,-23.75 25,26.25 -25,26.25
GND on Top Layer "GND_L01_P028" (solid, remove dead copper, pour order 28): -25,-23.75 25,-23.75 25,26.25 -25,26.25
GND on Layer 3 (split plane): 24.49,-23.24 15.51,-23.24 15.51,-5.344 15.501,-5.245 15.472,-5.149 15.424,-5.061 15.361,-4.983 15.284,-4.92 15.195,-4.873 15.1,-4.844 15,-4.834 -15,-4.834 -15.1,-4.844 -15.195,-4.873 -15.284,-4.92 -15.361,-4.983 -15.424,-5.061 -15.472,-5.149 -15.501,-5.245 -15.51,-5.344 -15.51,-23.24 -24.49,-23.24 -24.49,25.74 -15.51,25.74 -15.51,20.05 -15.501,19.95 -15.472,19.855 -15.424,19.766 -15.361,19.689 -15.284,19.626 -15.195,19.578 -15.1,19.549 -15,19.54 15,19.54 15.1,19.549 15.195,19.578 15.284,19.626 15.361,19.689 15.424,19.766 15.472,19.855 15.501,19.95 15.51,20.05 15.51,25.74 24.49,25.74
CPWR on Layer 2 (split plane): 24.49,-23.24 15.51,-23.24 15.51,-5.344 15.501,-5.245 15.472,-5.149 15.424,-5.061 15.361,-4.983 15.284,-4.92 15.195,-4.873 15.1,-4.844 15,-4.834 -15,-4.834 -15.1,-4.844 -15.195,-4.873 -15.284,-4.92 -15.361,-4.983 -15.424,-5.061 -15.472,-5.149 -15.501,-5.245 -15.51,-5.344 -15.51,-23.24 -24.49,-23.24 -24.49,25.74 -15.51,25.74 -15.51,20.05 -15.501,19.95 -15.472,19.855 -15.424,19.766 -15.361,19.689 -15.284,19.626 -15.195,19.578 -15.1,19.549 -15,19.54 15,19.54 15.1,19.549 15.195,19.578 15.284,19.626 15.361,19.689 15.424,19.766 15.472,19.855 15.501,19.95 15.51,20.05 15.51,25.74 24.49,25.74

## Keep-outs
Keep-Out Layer:
  lines w0.1: -25,-23.75 -25,26.25 25,26.25 25,-23.75 -25,-23.75 ; -20.15,11.9 -9.85,11.9 -9.85,13.75 -20.15,13.75 -20.15,11.9 ; 9.85,11.9 9.85,13.75 20.15,13.75 20.15,11.9 9.85,11.9

## Silkscreen, mask and mechanical layers (free items; w line width, h text height)
Board Shape:
  the board outline again, w0.05

## Text inside footprints (layer, text, board x,y; h text height)
"Logo FxLand1": Bottom Overlay "Fx.Land" at 22.684,-3.658 h5